# EAGLE board Boostconverter Project (EAGLE 9.6.2)

No outline drawn. Coordinates in mm, seen from the top.
Copper layers (1*16): Top 0.035mm / dielectric 1.5mm / Bottom 0.035mm
Design rules "default": minimum track width 6mil, minimum drill 0.35mm, track to track 6mil, track to pad 6mil, pad to pad 6mil, via to via 6mil, smd to smd 6mil, copper to edge 40mil, drill to drill 6mil, minimum pad ring 10mil, minimum via ring 8mil, stop-mask expansion 4mil, vias tented up to drill 0mil, thermal gap 10mil

## Footprints (pad centres in the part's own frame; a part is rotated, then mirrored left to right if it is on the bottom)
T-30_V = drill 1.016 long: 1 -2.5,-3.1; 2 0,-3.1; 3 2.5,-3.1
W237-102 = drill 1.194 long: 1 -2.5,-1.27; 2 2.5,-1.27
DO35-10 = drill 0.813 long: A 5.08,0; C -5.08,0
E5-10,5 = drill 1.016 pad 2.54: + -2.54,0 | drill 1.016 pad 2.54 octagon: - 2.54,0
1X01_LONGPAD = drill 1.118 pad 1.88 long: 1 0,0
DIL04 = drill 0.813 long: 1 -1.27,-3.81; 2 1.27,-3.81; 3 1.27,3.81; 4 -1.27,3.81
0207/10 = drill 0.813 octagon: 1 -5.08,0; 2 5.08,0
LED3MM = drill 0.813 octagon: A -1.27,0; K 1.27,0
LCD-16X2 = drill 1.016 pad 1.88 square: 1 -32,15.5 | drill 1.016 pad 1.88: 2 -29.46,15.5; 3 -26.92,15.5; 4 -24.38,15.5; 5 -21.84,15.5; 6 -19.3,15.5; 7 -16.76,15.5; 8 -14.22,15.5; 9 -11.68,15.5; 10 -9.14,15.5; 11 -6.6,15.5; 12 -4.06,15.5; 13 -1.52,15.5; 14 1.02,15.5; 15 3.56,15.5; 16 6.1,15.5 | hole 2.8: -37.5,15.5; -37.5,-15.5; 37.5,15.5; 37.5,-15.5
BLUE_PILL = drill 0.8 long: P$1 -7.62,15.24; P$2 -7.62,12.7; P$3 -7.62,10.16; P$4 -7.62,7.62; P$5 -7.62,5.08; P$6 -7.62,2.54; P$7 -7.62,0; P$8 -7.62,-2.54; P$9 -7.62,-5.08; P$10 -7.62,-7.62; P$11 -7.62,-10.16; P$12 -7.62,-12.7; P$13 -7.62,-15.24; P$14 -7.62,-17.78; P$15 -7.62,-20.32; P$16 -7.62,-22.86; P$17 -7.62,-25.4; P$18 -7.62,-27.94; P$19 -7.62,-30.48; P$20 -7.62,-33.02; P$21 7.62,15.24; P$22 7.62,12.7; P$23 7.62,10.16; P$24 7.62,7.62; P$25 7.62,5.08; P$26 7.62,2.54; P$27 7.62,0; P$28 7.62,-2.54; P$29 7.62,-5.08; P$30 7.62,-7.62; P$31 7.62,-10.16; P$32 7.62,-12.7; P$33 7.62,-15.24; P$34 7.62,-17.78; P$35 7.62,-20.32; P$36 7.62,-22.86; P$37 7.62,-25.4; P$38 7.62,-27.94; P$39 7.62,-30.48; P$40 7.62,-33.02
RACON12 = drill 1.194 long: 1 -6.248,2.489; 2 6.248,2.489; 3 -6.248,-2.489; 4 6.248,-2.489

## Placement (x,y rotation side)
E$1  [T-30_V]  86.36,63.5 0 top
E$2  [W237-102]  55.88,46.99 90 top
E$3  [W237-102]  55.88,59.69 90 top
E$4  [DO35-10]  86.36,53.34 0 top
E$5  [E5-10,5]  100.33,46.99 0 top
E$6  [1X01_LONGPAD]  68.58,60.96 180 top
E$7  [1X01_LONGPAD]  73.66,58.42 180 top
E$8  [W237-102]  115.57,58.42 270 top
E$9  [DIL04]  86.36,48.26 270 top
E$10  [0207/10]  68.58,46.99 90 top
E$11  [0207/10]  73.66,46.99 90 top
E$12  [LED3MM]  100.33,62.23 0 top
E$13  [LCD-16X2]  85.09,-7.62 0 top
E$14  [LED3MM]  99.06,55.88 0 top
E$15  [BLUE_PILL]  68.58,25.4 90 top
E$16  [RACON12]  119.38,38.1 180 top
E$17  [RACON12]  119.38,21.59 180 top

## Library data of the parts
E$1 = transistor-neu-to92
E$2 E$3 E$8 = con-wago-500
E$4 = diode
E$5 E$10 E$11 = rcl
E$6 E$7 = SparkFun-Connectors
E$9 = ic-package
E$12 E$14 = led
E$13 = SparkFun-Displays
E$15 = BluePill
E$16 E$17 = switch-misc